# Altium PCB Sheet1.PcbDoc
Units mil, origin at the board's own origin, x right, y up, seen from the top; angles counter-clockwise.
Board outline 6000 x 4000 mil, 2 copper layers (Top Layer, Bottom Layer); 12 components, 17 nets, 78 pads, 0 vias.
Unrouted connection lines stored in the file: 30.
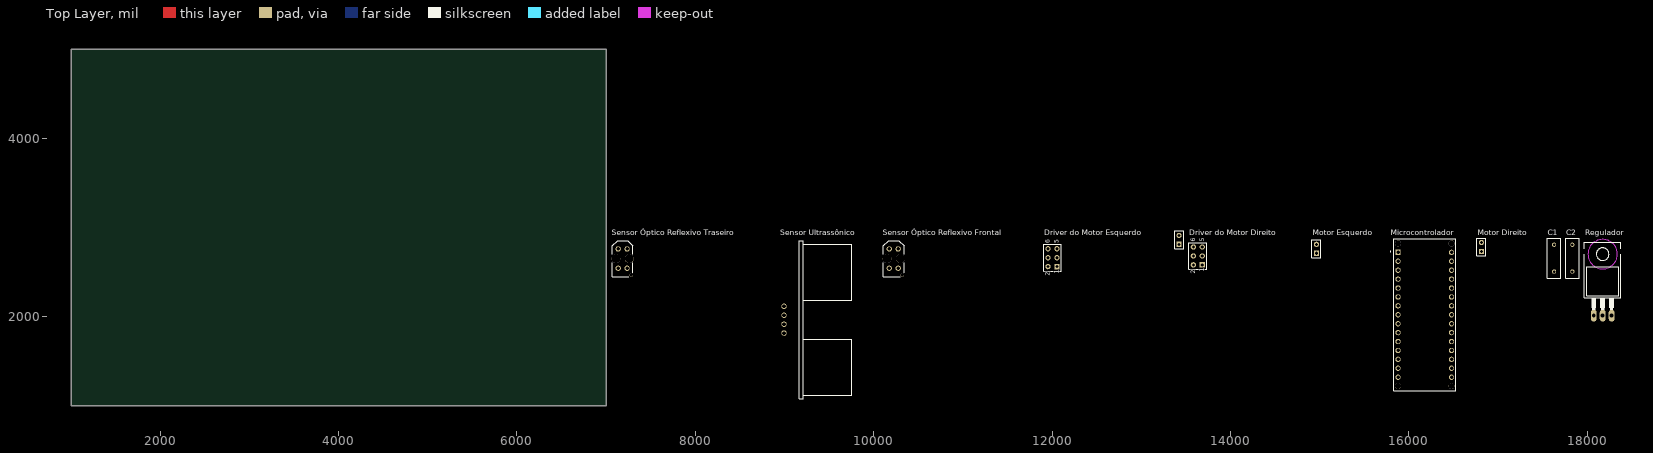
[diagram p0: Top Layer view]
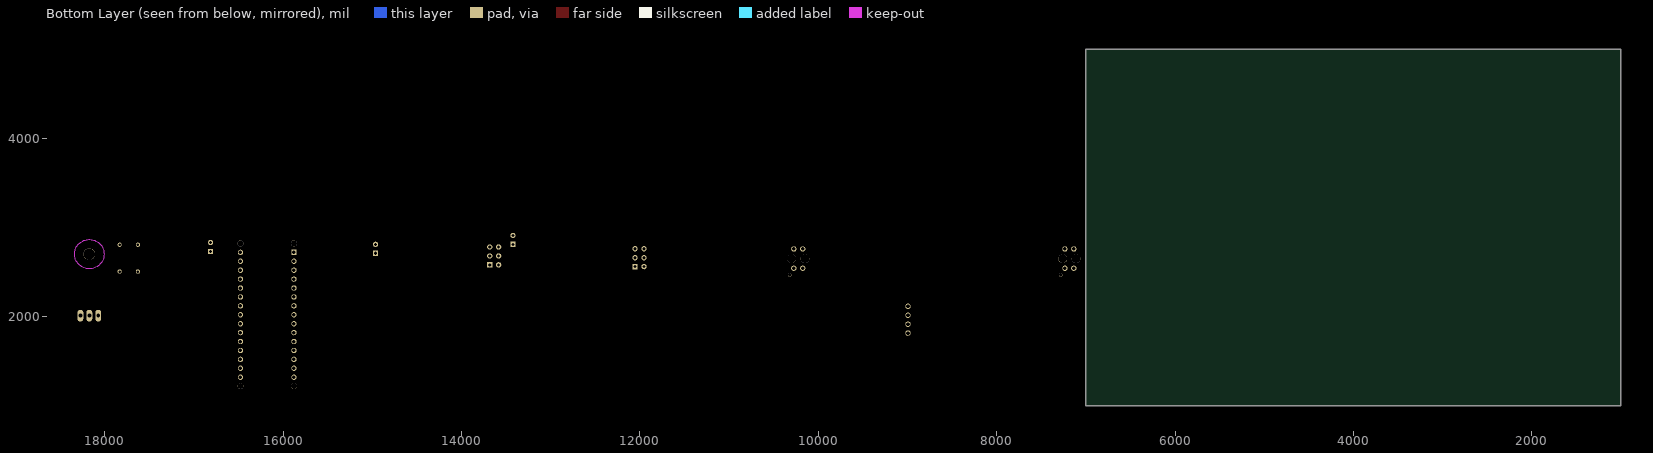
[diagram p1: Bottom Layer view, seen from below]

## Layer stack, top to bottom
Top Solder: solder mask 0.4, Solder Resist, Dk 3.5
Top Layer: signal copper 1.4
Dielectric 1: dielectric 12.6, FR-4, Dk 4.8
Bottom Layer: signal copper 1.4
Bottom Solder: solder mask 0.4, Solder Resist, Dk 3.5

## Board outline
1000,1000 7000,1000 7000,5000 1000,5000

## Design rules (kind name [scope] priority, off if disabled: settings)
Clearance [All] p1: gap=10 ignorepadtopadclearanceinfootprint=FALSE except(0: Arc-Hole Track-Hole SMDPad-Hole THPad-Hole Via-Hole Fill-Hole Poly-Hole Region-Hole Text-Hole)
PolygonConnect [All] p1: connectstyle=Relief reliefconductorwidth=10 reliefentries=4 polygonreliefangle="90 Angle" airgapwidth=10
RoomDefinition Sheet1 [InComponentClass('Sheet1')] p1: confinementstyle=ConfineIn formatcopy=TRUE lockcomponents=FALSE outline 7045,1060 18495,1060 18495,2990 7045,2990
RoutingVias [All] p1: holewidth=28 width=50 viastyle="Through Hole" minholewidth=28 minwidth=50 maxholewidth=28 maxwidth=50
SolderMaskExpansion [All] p1: expansion=4 istentingtop=FALSE
Width [All] p1: maxlimit=10 minlimit=10 preferedwidth=10
30 further rules are at their usual default settings.

## Components (designator, comment, footprint, x,y, rotation, side; value= is the part's Value field where it differs from the comment)
C1 "Cap" RAD-0.3 17630,2655 r90 top value=100pF
C2 "Cap" RAD-0.3 17835,2655 r90 top value=100pF
"Driver do Motor Direito" "Header 3X2" HDR2X3 13685,2580 r90 top
"Driver do Motor Esquerdo" "Header 3X2" HDR2X3 12055,2560 r90 top
Microcontrolador "A000005" MODULE_A000005 16180,2020 r0 top
"Motor Direito" "Header 2" HDR1X2 16815,2730 r90 top
"Motor Esquerdo" "Header 2" HDR1X2 14965,2710 r90 top
Regulador "LM7805" TO220 18175,2260 r0 top
"Sensor Ultrassônico" "HC-SR04" XCVR_HC-SR04 8995,1965 r90 top
"Sensor Óptico Reflexivo Frontal" "TCRT5000" OPTO_TCRT5000 10225,2650 r90 top
"Sensor Óptico Reflexivo Traseiro" "TCRT5000" OPTO_TCRT5000 7185,2650 r90 top
? "Bateria" HDR1X2 13425,2810 r90 top

## Footprints (in the part's own frame and the unit in brackets; to place one, negate y for a bottom-side part, rotate by r counter-clockwise, add the part's x,y. Pads: shape width x height; smd on the part's side, far side on the other; paste and mask are expansions set on the pad)
HDR1X2 [mm] "Connector; Header; 2 Position"
  rect 1.5x1.5 hole 0.9: 1(0,0)
  round 1.5 hole 0.9: 2(2.54,0)
  silkscreen extent -1.27,-1.27 3.81,1.27
HDR2X3 [mm] "Connector; Header; 3x2 Position"
  rect 1.5x1.5 hole 0.9: 1(0,0)
  round 1.5 hole 0.9: 2(0,2.54) 3(2.54,0) 4(2.54,2.54) 5(5.08,0) 6(5.08,2.54)
  silkscreen extent -1.27,-1.27 6.35,3.81
MODULE_A000005 [mm]
  rect 1.508x1.508 hole 1: 1(-7.62,17.78)
  round 1.508 hole 1: 2(-7.62,15.24) 3(-7.62,12.7) 4(-7.62,10.16) 5(-7.62,7.62) 6(-7.62,5.08) 7(-7.62,2.54) 8(-7.62,0) 9(-7.62,-2.54) 10(-7.62,-5.08) 11(-7.62,-7.62) 12(-7.62,-10.16) 13(-7.62,-12.7) 14(-7.62,-15.24) 15(-7.62,-17.78) 16(7.62,-17.78) 17(7.62,-15.24) 18(7.62,-12.7) 19(7.62,-10.16) 20(7.62,-7.62) 21(7.62,-5.08) 22(7.62,-2.54) 23(7.62,0) 24(7.62,2.54) 25(7.62,5.08) 26(7.62,7.62) 27(7.62,10.16) 28(7.62,12.7) 29(7.62,15.24) 30(7.62,17.78)
  round 1.651 hole 1.651 unplated: ""(-7.62,-20.32) ""(-7.62,20.32) ""(7.62,-20.32) ""(7.62,20.32)
  silkscreen extent -9.85,-21.59 8.89,21.59
OPTO_TCRT5000 [mm]
  round 1.5 hole 1: A(2.75,1.27) CATH(2.75,-1.27) COLL(-2.75,1.27) E(-2.75,-1.27)
  round 1 hole 1 unplated: ""(-4.65,-2.45)
  round 2.5 hole 2.5 unplated: ""(0,1.9) ""(0,-1.9)
  silkscreen extent -5.15,-2.95 5.15,2.95
RAD-0.3 [mm] "Radial Cap, Thru-Hole; 2 Leads; 0.3 in Pin Spacing"
  round 1.2 hole 0.7: 1(-3.81,0) 2(3.81,0)
  silkscreen extent -5.71,-1.91 5.71,1.91
TO220 [mil]
  oval 66x132 hole 44: 1(-100,-250) 2(0,-250) 3(100,-250)
  round 130 hole 130 unplated: ""(0,440)
  Keep-Out Layer circle w0: c0,440 r165
  Keep-Out Layer circle w0: c0,440 r165
  silkscreen extent -205,-185 205,575
XCVR_HC-SR04 [mm]
  round 1.53 hole 1.02: 1(-3.81,0) 2(-1.27,0) 3(1.27,0) 4(3.81,0)
  silkscreen extent -22.5,-19.27 22.5,-4.27

## Part data
C1 C2: "Capacitor", LatestRevisionDate=17-Jul-2002, LatestRevisionNote="Re-released for DXP Platform.", PackageDescription="Radial Cap, Thru-Hole; 2 Leads; 0.3 in Pin Spacing", PackageReference=RAD-0.3, Published=8-Jun-2000, Publisher="Altium Limited"
"Driver do Motor Direito" "Driver do Motor Esquerdo": "Header, 3-Pin, Dual row", LatestRevisionDate=17-Jul-2002, LatestRevisionNote="Re-released for DXP Platform.", Publisher="Altium Limited"
Microcontrolador: "CLOCK SAW OSCILLATOR SEAM7050 T&", Package=None, Availability=Unavailable, MP=A000005, Price=None
"Motor Direito" "Motor Esquerdo": "Header, 2-Pin", LatestRevisionDate=17-Jul-2002, LatestRevisionNote="Re-released for DXP Platform.", Publisher="Altium Limited"
Regulador: Package=None, Availability=Unavailable, MP=LM7805, Price=None
"Sensor Ultrassônico": "Ultrasonic Sensor Module", Package=None, Availability=Unavailable, MP=HC-SR04, Price=None
"Sensor Óptico Reflexivo Frontal" "Sensor Óptico Reflexivo Traseiro": "950 nm 60 mA Through Hole Reflective Optical Sensor with Transistor Output", Package=None, Availability=Unavailable, MP=TCRT5000, Price=None
?: library part "Header 2", "Header, 2-Pin", LatestRevisionDate=17-Jul-2002, LatestRevisionNote="Re-released for DXP Platform.", Publisher="Altium Limited"

## Nets (pads, with @x,y where several pads share a name; then routed paths per layer and width w, separated by ;. In a path a pad name is that pad's centre, name@x,y a point inside that pad or via, vN(x,y) a via of type N, cw(c..) or ccw(c..) an arc to the next point about the centre after c; other vN are vias at no path point)
5V: "Sensor Óptico Reflexivo Frontal.A" "Sensor Óptico Reflexivo Traseiro.A" C2.2 Microcontrolador.27 Regulador.3
"DRV Direito 1": "Driver do Motor Direito.3" Microcontrolador.10
"DRV Direito 2": "Driver do Motor Direito.5" Microcontrolador.11
"DRV Esquerdo 1": "Driver do Motor Esquerdo.3" Microcontrolador.12
"DRV Esquerdo 2": "Driver do Motor Esquerdo.5" Microcontrolador.13
Echo: "Sensor Ultrassônico.3" Microcontrolador.15
GND: "Driver do Motor Direito.2" "Driver do Motor Esquerdo.2" "Sensor Ultrassônico.4" "Sensor Óptico Reflexivo Frontal.CATH" "Sensor Óptico Reflexivo Traseiro.CATH" C1.1 C2.1 Microcontrolador.4 Regulador.2
"Motor Direito 1": "Driver do Motor Direito.4" "Motor Direito.1"
"Motor Direito 2": "Driver do Motor Direito.6" "Motor Direito.2"
"Motor Esquerdo 1": "Driver do Motor Esquerdo.4" "Motor Esquerdo.1"
"Motor Esquerdo 2": "Driver do Motor Esquerdo.6" "Motor Esquerdo.2"
"SORF Collect": "Sensor Óptico Reflexivo Frontal.COLL" Microcontrolador.6
"SORF Emission": "Sensor Óptico Reflexivo Frontal.E" Microcontrolador.7
"SORT Collect": "Sensor Óptico Reflexivo Traseiro.COLL" Microcontrolador.8
"SORT Emission": "Sensor Óptico Reflexivo Traseiro.E" Microcontrolador.9
Trigger: "Sensor Ultrassônico.2" Microcontrolador.14
VCC: "Driver do Motor Direito.1" "Driver do Motor Esquerdo.1" "Sensor Ultrassônico.1" C1.2 Regulador.1
pads on no net: "Sensor Óptico Reflexivo Frontal." "Sensor Óptico Reflexivo Traseiro." ?.1 ?.2 Microcontrolador. Microcontrolador.1 Microcontrolador.2 Microcontrolador.3 Microcontrolador.5 Microcontrolador.16 Microcontrolador.17 Microcontrolador.18 Microcontrolador.19 Microcontrolador.20 Microcontrolador.21 Microcontrolador.22 Microcontrolador.23 Microcontrolador.24 Microcontrolador.25 Microcontrolador.26 Microcontrolador.28 Microcontrolador.29 Microcontrolador.30 Regulador.

## Text inside footprints (layer, text, board x,y; h text height)
"Driver do Motor Direito": Top Overlay "6" at 13605,2840 h50 r90; Top Overlay "5" at 13705,2840 h50 r90; Top Overlay "2" at 13605,2480 h50 r90; Top Overlay "1" at 13705,2500 h50 r90
"Driver do Motor Esquerdo": Top Overlay "6" at 11975,2820 h50 r90; Top Overlay "5" at 12075,2820 h50 r90; Top Overlay "2" at 11975,2460 h50 r90; Top Overlay "1" at 12075,2480 h50 r90
Regulador: Mechanical 13 "1" at 18049.76,2260 h50.1; Mechanical 13 "2" at 18149.96,2260 h50.08; Mechanical 13 "3" at 18250.02,2260 h50.01